# EAGLE board Driver (EAGLE 9.6.2)
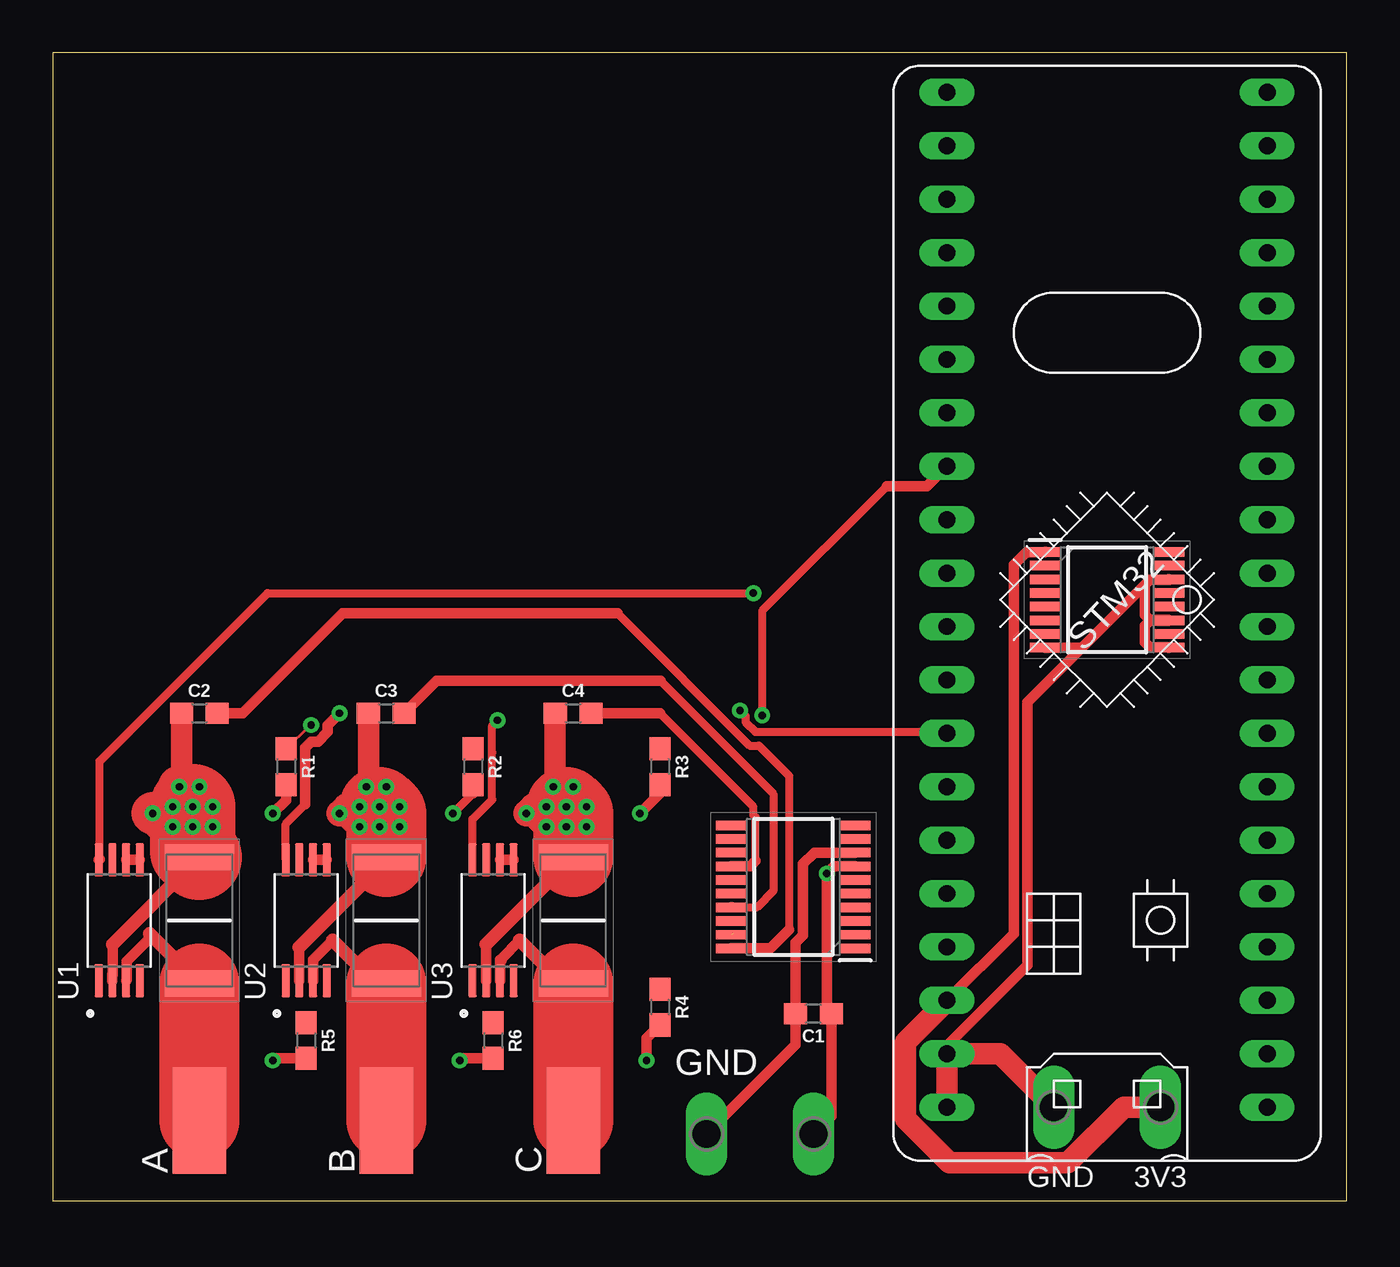
[diagram p0: board, top side]
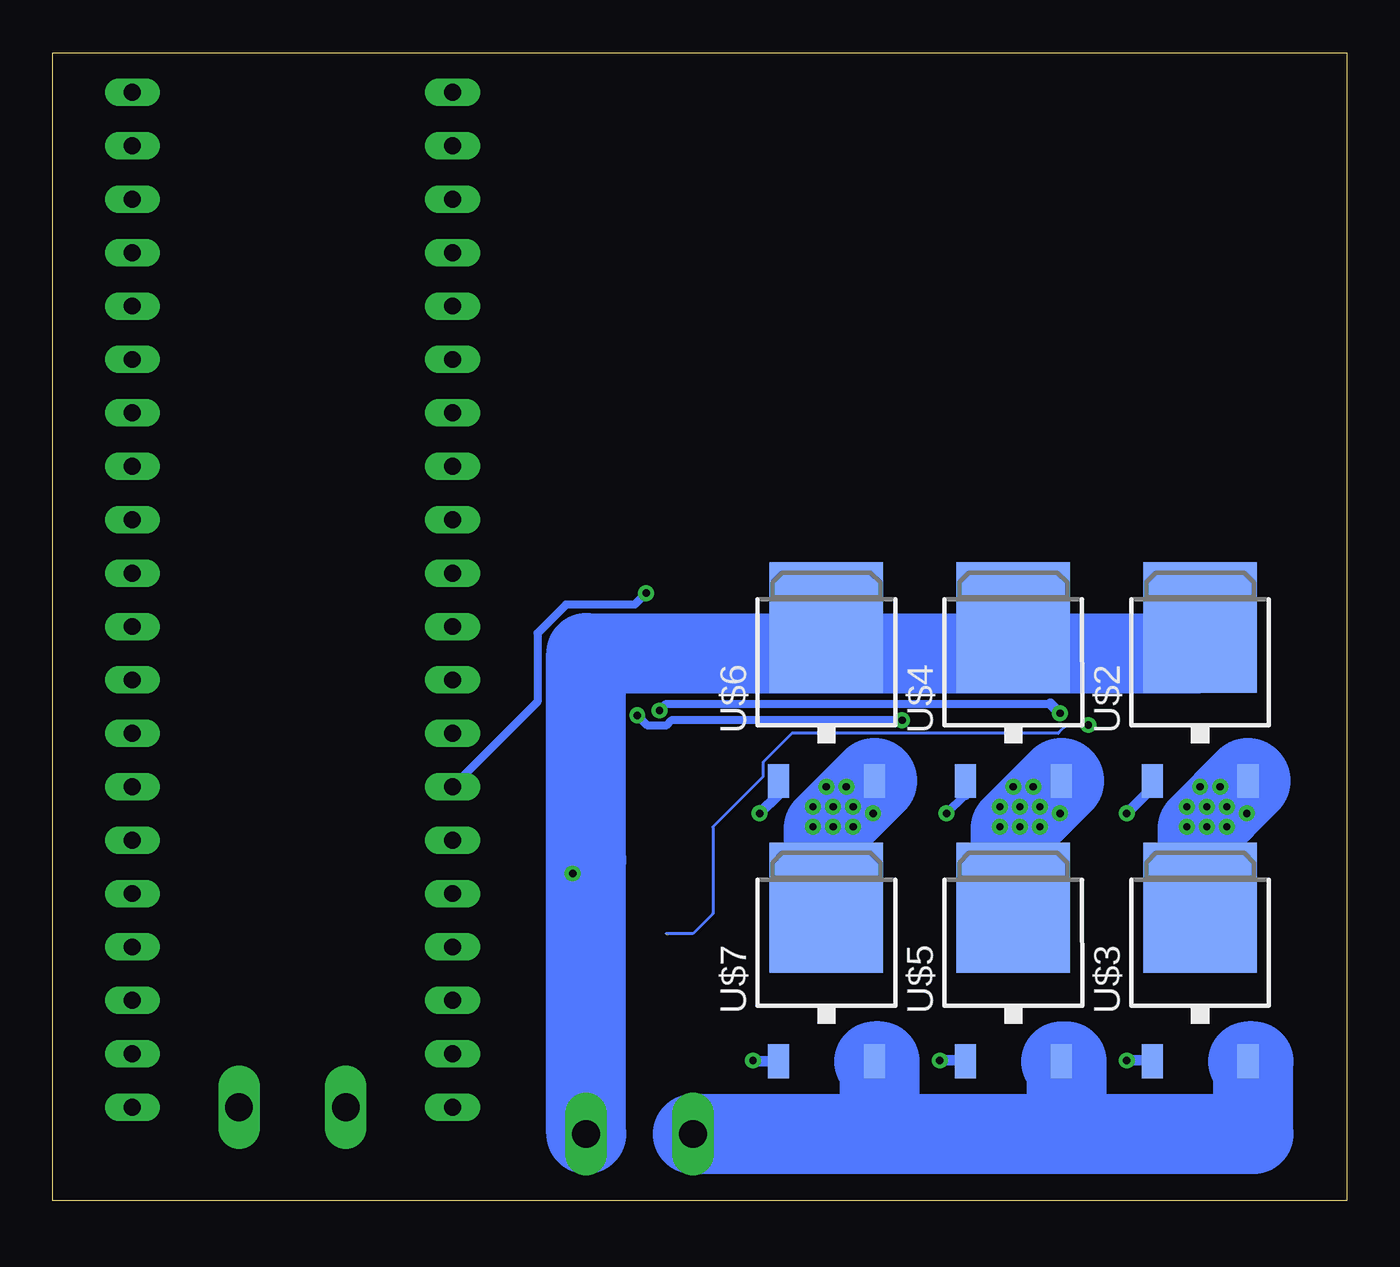
[diagram p1: board, bottom side, seen from below]

Size 61.58 x 54.6 mm. Coordinates in mm from the lower left corner, seen from the top.
Outline: 0,0 61.58,0 61.58,54.6 0,54.6 0,0
Copper layers (1*16): Top 0.035mm / dielectric 1.5mm / Bottom 0.035mm
Design rules "default *": minimum track width 6mil, minimum drill 0.35mm, track to track 6mil, track to pad 6mil, pad to pad 6mil, via to via 6mil, smd to smd 6mil, copper to edge 40mil, drill to drill 6mil, minimum pad ring 10mil, minimum via ring 8mil, stop-mask expansion 4mil, vias tented up to drill 3mm, thermal gap 10mil

## Footprints (pad centres in the part's own frame; a part is rotated, then mirrored left to right if it is on the bottom)
SMD2,54-5,08 = smd 2.54 x 5.08: 1 0,0
0603 = smd 1.1 x 1: 1 -0.85,0; 2 0.85,0
P1-13Y = drill 1.321 pad 1.905 long: TP 0,0
SOP65P640X120-20N = smd 1.475 x 0.45: 1 -2.938,2.925; 2 -2.938,2.275; 3 -2.938,1.625; 4 -2.938,0.975; 5 -2.938,0.325; 6 -2.938,-0.325; 7 -2.938,-0.975; 8 -2.938,-1.625; 9 -2.938,-2.275; 10 -2.938,-2.925; 11 2.938,-2.925; 12 2.938,-2.275; 13 2.938,-1.625; 14 2.938,-0.975; 15 2.938,-0.325; 16 2.938,0.325; 17 2.938,0.975; 18 2.938,1.625; 19 2.938,2.275; 20 2.938,2.925
SOP65P640X120-16N = smd 1.475 x 0.45: 1 -2.938,2.275; 2 -2.938,1.625; 3 -2.938,0.975; 4 -2.938,0.325; 5 -2.938,-0.325; 6 -2.938,-0.975; 7 -2.938,-1.625; 8 -2.938,-2.275; 9 2.938,-2.275; 10 2.938,-1.625; 11 2.938,-0.975; 12 2.938,-0.325; 13 2.938,0.325; 14 2.938,0.975; 15 2.938,1.625; 16 2.938,2.275
RESC6331X75N = smd 1.25 x 3.3: 1 -3,0; 2 3,0
SOP65P640X120-8N = smd 1.57 x 0.41: 1 -2.87,0.975; 2 -2.87,0.325; 3 -2.87,-0.325; 4 -2.87,-0.975; 5 2.87,-0.975; 6 2.87,-0.325; 7 2.87,0.325; 8 2.87,0.975
BLUE_PILL = drill 0.8 long: P$1 -7.62,15.24; P$2 -7.62,12.7; P$3 -7.62,10.16; P$4 -7.62,7.62; P$5 -7.62,5.08; P$6 -7.62,2.54; P$7 -7.62,0; P$8 -7.62,-2.54; P$9 -7.62,-5.08; P$10 -7.62,-7.62; P$11 -7.62,-10.16; P$12 -7.62,-12.7; P$13 -7.62,-15.24; P$14 -7.62,-17.78; P$15 -7.62,-20.32; P$16 -7.62,-22.86; P$17 -7.62,-25.4; P$18 -7.62,-27.94; P$19 -7.62,-30.48; P$20 -7.62,-33.02; P$21 7.62,15.24; P$22 7.62,12.7; P$23 7.62,10.16; P$24 7.62,7.62; P$25 7.62,5.08; P$26 7.62,2.54; P$27 7.62,0; P$28 7.62,-2.54; P$29 7.62,-5.08; P$30 7.62,-7.62; P$31 7.62,-10.16; P$32 7.62,-12.7; P$33 7.62,-15.24; P$34 7.62,-17.78; P$35 7.62,-20.32; P$36 7.62,-22.86; P$37 7.62,-25.4; P$38 7.62,-27.94; P$39 7.62,-30.48; P$40 7.62,-33.02
TO252 = smd 1 x 1.6: 1 -2.28,-4.8; 2 2.28,-4.8 | smd 5.4 x 6.2: 3 0,2.5

## Placement (x,y rotation side)
A  [SMD2,54-5,08]  6.98,3.81 0 top
B  [SMD2,54-5,08]  15.88,3.81 0 top
C  [SMD2,54-5,08]  24.77,3.81 0 top
C1  10uF  [0603]  36.2,8.89 180 top
C2  1.0uF  [0603]  6.98,23.18 0 top
C3  1.0uF  [0603]  15.88,23.18 0 top
C4  1.0uF  [0603]  24.77,23.18 0 top
GND  TPPAD1-13Y  [P1-13Y]  31.11,3.17 0 top
IC1  DRV8300DIPWR  [SOP65P640X120-20N]  35.24,14.92 180 top
IC2  CD74HC4049PWR  [SOP65P640X120-16N]  50.17,28.58 0 top
R1  100  [0603]  11.11,20.64 270 top
R2  100  [0603]  20,20.64 270 top
R3  100  [0603]  28.89,20.64 270 top
R4  100  [0603]  28.89,9.21 270 top
R5  100  [0603]  12.06,7.62 270 top
R6  100  [0603]  20.95,7.62 270 top
R7  CR2512-FX-51R1ELF  [RESC6331X75N]  6.98,13.33 90 top
R8  CR2512-FX-51R1ELF  [RESC6331X75N]  15.88,13.33 90 top
R9  CR2512-FX-51R1ELF  [RESC6331X75N]  24.77,13.33 90 top
TP6  TPPAD1-13Y  [P1-13Y]  52.7,4.45 0 top
TP7  TPPAD1-13Y  [P1-13Y]  47.63,4.45 0 top
U1  INA240A1PWR  [SOP65P640X120-8N]  3.17,13.33 90 top
U2  INA240A1PWR  [SOP65P640X120-8N]  12.06,13.33 90 top
U3  INA240A1PWR  [SOP65P640X120-8N]  20.95,13.33 90 top
U$1  [BLUE_PILL]  50.17,19.69 180 top
U$2  IRLR7843  [TO252]  6.98,24.77 0 bottom
U$3  IRLR7843  [TO252]  6.98,11.43 0 bottom
U$4  IRLR7843  [TO252]  15.88,24.77 0 bottom
U$5  IRLR7843  [TO252]  15.88,11.43 0 bottom
U$6  IRLR7843  [TO252]  24.77,24.77 0 bottom
U$7  IRLR7843  [TO252]  24.77,11.43 0 bottom
VCC  TPPAD1-13Y  [P1-13Y]  36.2,3.17 0 top

## Library data of the parts
A B C = wirepad
C1 = SparkFun-Capacitors; PROD_ID: CAP-11015
C2-C4 = SparkFun-Capacitors; PROD_ID: CAP-00868
GND TP6 TP7 VCC = testpad
IC1 = DRV8300DIPWR; ARROW_PART_NUMBER: DRV8300DIPWR; ARROW_PRICE-STOCK: https://www.arrow.com/en/products/drv8300dipwr/texas-instruments?region=nac; DESCRIPTION: DRV8300DIPWR; HEIGHT: 1.2mm; MANUFACTURER_NAME: Texas Instruments; MANUFACTURER_PART_NUMBER: DRV8300DIPWR; MOUSER_PART_NUMBER: 595-DRV8300DIPWR; MOUSER_PRICE-STOCK: https://www.mouser.co.uk/ProductDetail/Texas-Instruments/DRV8300DIPWR?qs=CiayqK2gdcI4er0Qz5HSWg%3D%3D
IC2 = CD74HC4049PWR; ARROW_PART_NUMBER: CD74HC4049PWR; ARROW_PRICE-STOCK: https://www.arrow.com/en/products/cd74hc4049pwr/texas-instruments; DESCRIPTION: High Speed CMOS Logic Hex Inverting Buffers; HEIGHT: 1.2mm; MANUFACTURER_NAME: Texas Instruments; MANUFACTURER_PART_NUMBER: CD74HC4049PWR; MOUSER_PART_NUMBER: 595-CD74HC4049PWR; MOUSER_PRICE-STOCK: https://www.mouser.com/Search/Refine.aspx?Keyword=595-CD74HC4049PWR
R1-R6 = SparkFun-Resistors; PROD_ID: RES-07863
R7-R9 = CR2512-FX-51R1ELF; ARROW_PART_NUMBER: CR2512-FX-51R1ELF; ARROW_PRICE-STOCK: https://www.arrow.com/en/products/cr2512-fx-51r1elf/bourns; DESCRIPTION: BOURNS - CR2512-FX-51R1ELF - RES 2512 51R1 1% 1W TC100 28X7511; HEIGHT: 0.75mm; MANUFACTURER_NAME: Bourns; MANUFACTURER_PART_NUMBER: CR2512-FX-51R1ELF; MOUSER_PART_NUMBER: 652-CR2512FX51R1ELF; MOUSER_PRICE-STOCK: https://www.mouser.com/Search/Refine.aspx?Keyword=652-CR2512FX51R1ELF
U1-U3 = INA240A1PWR; AVAILABILITY: In Stock; DESCRIPTION: -4 to 80V, bidirectional, ultra-precise current sense amplifier with enhanced PWM rejection 8-TSSOP -40 to 125; MF: Texas Instruments; MP: INA240A1PWR; PACKAGE: TSSOP-8 Texas Instruments; PRICE: None; PURCHASE-URL: https://pricing.snapeda.com/search/part/INA240A1PWR/?ref=eda
U$1 = BluePill
U$2-U$7 = BLDC project

## Nets
3V3: IC2.1 TP6.TP U1.5 U1.6 U2.5 U2.6 U3.5 U3.6 U$1.P$20 U$1.P$23
5V: U$1.P$18
BSTA: C2.2 IC1.20
BSTB: C3.2 IC1.17
BSTC: C4.2 IC1.14
GHA: IC1.19 R1.1
GHB: IC1.16 R2.1
GHC: IC1.13 R3.1
GLA: IC1.11 R5.1
GLB: IC1.10 R6.1
GLC: IC1.9 R4.1
GND: C1.2 GND.TP IC1.8 IC2.8 IC2.9 IC2.11 IC2.14 TP7.TP U1.4 U1.7 U2.4 U2.7 U3.4 U3.7 U$1.P$19 U$1.P$21 U$1.P$22 U$3.2 U$5.2 U$7.2
INHA: IC1.1 IC2.3 U$1.P$5
INHB: IC1.2 IC2.5 U$1.P$7
INHC: IC1.3 IC2.7 U$1.P$15
INLA: IC1.4 IC2.2
INLB: IC1.5 IC2.4
INLC: IC1.6 IC2.6
N$1: R1.2 U$2.1
N$2: R2.2 U$4.1
N$3: R3.2 U$6.1
N$4: R5.2 U$3.1
N$5: R6.2 U$5.1
N$6: R4.2 U$7.1
PA0: U$1.P$36
PA1: U$1.P$35
PA2: U$1.P$34
PA3: U3.8 U$1.P$33
PA4: U$1.P$32
PA5: U$1.P$31
PA6: U$1.P$30
PA7: U$1.P$29
PA9: U$1.P$6
PA11: U$1.P$8
PA12: U$1.P$9
PA15: U$1.P$10
PB0: U2.8 U$1.P$28
PB1: U1.8 U$1.P$27
PB3: U$1.P$11
PB4: U$1.P$12
PB5: U$1.P$13
PB6: U$1.P$14
PB8: U$1.P$16
PB9: U$1.P$17
PB10: U$1.P$26
PB11: U$1.P$25
PB12: U$1.P$1
PB13: U$1.P$2
PB14: U$1.P$3
PB15: U$1.P$4
PC13: U$1.P$39
PC14: U$1.P$38
PC15: U$1.P$37
RESET: U$1.P$24
SHA: C2.1 IC1.18 R7.2 U1.2 U$2.2 U$3.3
SHB: C3.1 IC1.15 R8.2 U2.2 U$4.2 U$5.3
SHC: C4.1 IC1.12 R9.2 U3.2 U$6.2 U$7.3
SLA: A.1 R7.1 U1.3
SLB: B.1 R8.1 U2.3
SLC: C.1 R9.1 U3.3
VBAT: U$1.P$40
VCC: C1.1 IC1.7 U$2.3 U$4.3 U$6.3 VCC.TP

## Tracks (layer width: path | path; a pad name or v marks a point on that pad's centre or on a via)
3V3
  Top 0.508: U2.6 U2.5 | U1.6 U1.5 | U3.6 U3.5 | IC2.1 47.21,30.83 46.32,30.83 45.72,30.23 45.72,12.7 U$1.P$23
  Top 1.016: TP6.TP 50.95,4.45 48.31,1.8 42.67,1.8 40.58,3.9 40.58,7.53 42.55,9.5 U$1.P$23
BSTA
  Top 0.381: 35.04,12.89 35.04,20.2 33.6,21.64 33.16,21.64 26.87,27.93
  Top 0.508: C2.2 9.05,23.18 13.8,27.93 26.87,27.93 | 35.04,12.89 34.16,12.02 32.32,12.02 IC1.20
BSTB
  Top 0.381: 32.32,13.97 33.53,13.97 34.29,14.73 34.29,19.35 28.91,24.73
  Top 0.508: 28.91,24.73 18.27,24.73 C3.2 | IC1.17 32.32,13.97
BSTC
  Top 0.381: 33.45,16.15 33.45,18.24 33.34,18.35 33.34,18.73 28.89,23.18
  Top 0.508: 33.45,16.15 33.21,15.92 32.32,15.92 IC1.14 | 28.89,23.18 C4.2
GHA  (via drill 0.35)  (1 unrouted)
  Top 0.152: R1.1 12.25,22.62 v12.3,22.62
  Bottom 0.152: v12.3,22.62 13.35,22.62 13.7,22.27 13.75,22.23 26.41,22.23 27.77,20.86 27.77,20.17 30.16,17.78 30.16,13.65 31.11,12.7 32.39,12.7
GND
  Top 0.508: 53.12,29.53 IC2.14 53.08,29.53 52.2,29.53 51.96,29.29 | U$1.P$22 42.55,7.37 46.38,11.21 46.38,23.71 48.96,26.29 | 51.96,29.29 48.96,26.29 | 51.96,29.29 51.96,27.86 52.2,27.62 53.08,27.62 IC2.11 53.08,27.58 52.2,27.58 51.96,27.34 51.96,26.56 52.2,26.32 53.08,26.32 IC2.9 | IC2.8 48.95,26.3 48.96,26.29 | GND.TP 35.35,7.4 C1.2 35.35,12.26 35.7,12.62 35.7,16.01 36.23,16.55 IC1.8
  Top 1.016: TP7.TP 45.08,6.98 U$1.P$22 U$1.P$21
  Bottom 3.81: GND.TP 22.23,3.17 | 22.23,3.17 13.34,3.17 | 13.34,3.17 4.45,3.17 4.45,6.63 U$3.2 | 13.34,3.17 13.34,6.63 U$5.2 | 22.23,3.17 22.23,6.63 U$7.2
N$1  (via drill 0.35)
  Top 0.508: R1.2 11.11,19.05 v10.48,18.42
  Bottom 0.508: v10.48,18.42 9.27,19.63 U$2.1
N$2  (via drill 0.35)
  Top 0.381: 20,19.37 v19.05,18.42
  Top 0.508: R2.2 20,19.37
  Bottom 0.381: v19.05,18.42 18.16,19.31
  Bottom 0.508: 18.16,19.31 U$4.1
N$3  (via drill 0.35)
  Top 0.508: R3.2 28.89,19.37 v27.94,18.42
  Bottom 0.508: v27.94,18.42 27.05,19.31 U$6.1
N$4  (via drill 0.35)
  Top 0.508: R5.2 10.58,6.77 v10.48,6.67
  Bottom 0.508: v10.48,6.67 9.3,6.67 U$3.1
N$5  (via drill 0.35)
  Top 0.508: R6.2 19.47,6.77 v19.37,6.67
  Bottom 0.508: v19.37,6.67 18.19,6.67 U$5.1
N$6  (via drill 0.35)
  Top 0.508: R4.2 28.26,7.72 v28.26,6.67
  Bottom 0.508: v28.26,6.67 28.22,6.63 U$7.1
PA3  (via drill 0.35)
  Top 0.381: U3.8 19.98,18.14 20.91,19.07 20.91,21.32 20.91,22.59 v21.16,22.85 | 39.69,33.97 33.76,28.04 v33.76,23.08
  Top 0.508: U$1.P$33 41.59,33.97 39.69,33.97
  Bottom 0.381: v21.16,22.85 32.15,22.85 32.4,22.59 33.27,22.59 v33.76,23.08
PB0  (via drill 0.35)
  Top 0.381: U2.8 11.09,17.92 12.02,18.85 | v32.7,23.31 32.98,23.04 32.98,22.76 33.43,22.3 42.47,22.3
  Top 0.508: 12.02,18.85 12.02,21.54 12.31,21.84 12.63,21.84 13.09,22.3 13.09,22.61 v13.65,23.18 | 42.47,22.3 U$1.P$28
  Bottom 0.381: v32.7,23.31 32.39,23.63 14.11,23.63
  Bottom 0.508: v13.65,23.18 14.11,23.63
PB1  (via drill 0.35)
  Top 0.381: 2.24,16.24 2.24,20.91 10.23,28.89 v33.34,28.89
  Top 0.508: U1.8 2.24,16.24
  Bottom 0.381: v33.34,28.89 33.88,28.35 37.15,28.35 38.51,26.99 38.51,23.72 U$1.P$27
SHA  (via drill 0.35)
  Top 0.508: v4.76,18.42 5.08,18.73 v5.72,18.73 | U1.2 2.84,10.74 2.85,10.75 2.85,12.2
  Top 0.635: R7.2 2.85,12.2
  Top 1.016: C2.1 6.14,19.27 v6.67,18.73
  Top 2.032: v4.76,18.42 4.91,18.42 6.67,16.65 | v6.03,19.69 6.03,19.05 v5.72,18.73 | v6.98,19.69 6.98,19.05 v6.67,18.73 | v7.62,18.73 v7.62,17.78
  Top 4.064: R7.2 6.67,16.65 v6.67,18.73
  Bottom 4.064: U$2.2 6.98,17.69 U$3.3
  other vias: 6.67,17.78 5.72,17.78
SHB  (via drill 0.35)
  Top 0.508: 11.74,12.06 U2.2
  Top 0.635: R8.2 15.88,16.19 11.74,12.06
  Top 1.016: C3.1 15.03,19.27 v15.56,18.73
  Top 1.27: v15.56,18.73 13.97,18.73 v13.65,18.42 13.97,18.42 v14.61,17.78
  Top 3.81: v15.56,18.73 15.88,18.42 R8.2
  Bottom 4.064: U$4.2 15.88,17.69 U$5.3
  other vias: 14.92,19.69 15.88,19.69 14.61,18.73 16.51,18.73 16.51,17.78 15.56,17.78
SHC  (via drill 0.35)
  Top 0.508: 20.63,12.2 U3.2
  Top 0.635: R9.2 20.63,12.2
  Top 1.016: C4.1 23.92,19.27 v24.45,18.73
  Top 1.27: v24.45,18.73 22.86,18.73 v22.54,18.42 22.86,18.42 v23.5,17.78
  Top 3.81: v24.45,18.73 24.77,18.42 R9.2
  Bottom 4.064: U$6.2 24.77,17.69 U$7.3
  other vias: 23.81,19.69 24.77,19.69 23.5,18.73 25.4,18.73 25.4,17.78 24.45,17.78
SLA
  Top 0.508: U1.3 3.54,10.5 3.54,11.39 4.63,12.48 4.63,12.69
  Top 0.635: R7.1 4.63,12.69
  Top 3.81: R7.1 A.1
SLB
  Top 0.508: 13.34,12.38 12.4,11.45 12.4,10.46
  Top 0.635: R8.1 15.38,10.33 13.34,12.38
  Top 3.81: R8.1 B.1
SLC
  Top 0.508: 22.23,12.38 21.35,11.51 | 21.35,11.51 21.35,11.43 | 21.35,11.51 21.29,11.45 21.29,10.46
  Top 0.635: R9.1 24.27,10.33 22.23,12.38
  Top 3.81: R9.1 C.1
VCC  (via drill 0.35)
  Top 0.508: IC1.7 37.17,15.9 v36.83,15.56 36.83,9.11 C1.1 37.05,4.03 VCC.TP
  Bottom 0.508: v36.83,15.56 36.2,16.19
  Bottom 3.81: VCC.TP 36.2,16.19 36.2,26.04 6.98,26.04 U$2.3

## Text on the board
tPlace: GND | 3V3